# Altium PCB PCB1.PcbDoc
Units mil, origin at the board's own origin, x right, y up, seen from the top; angles counter-clockwise.
Board outline 5000 x 4000 mil, 2 copper layers (Top Layer, Bottom Layer); 17 components, 53 nets, 256 pads, 31 vias.
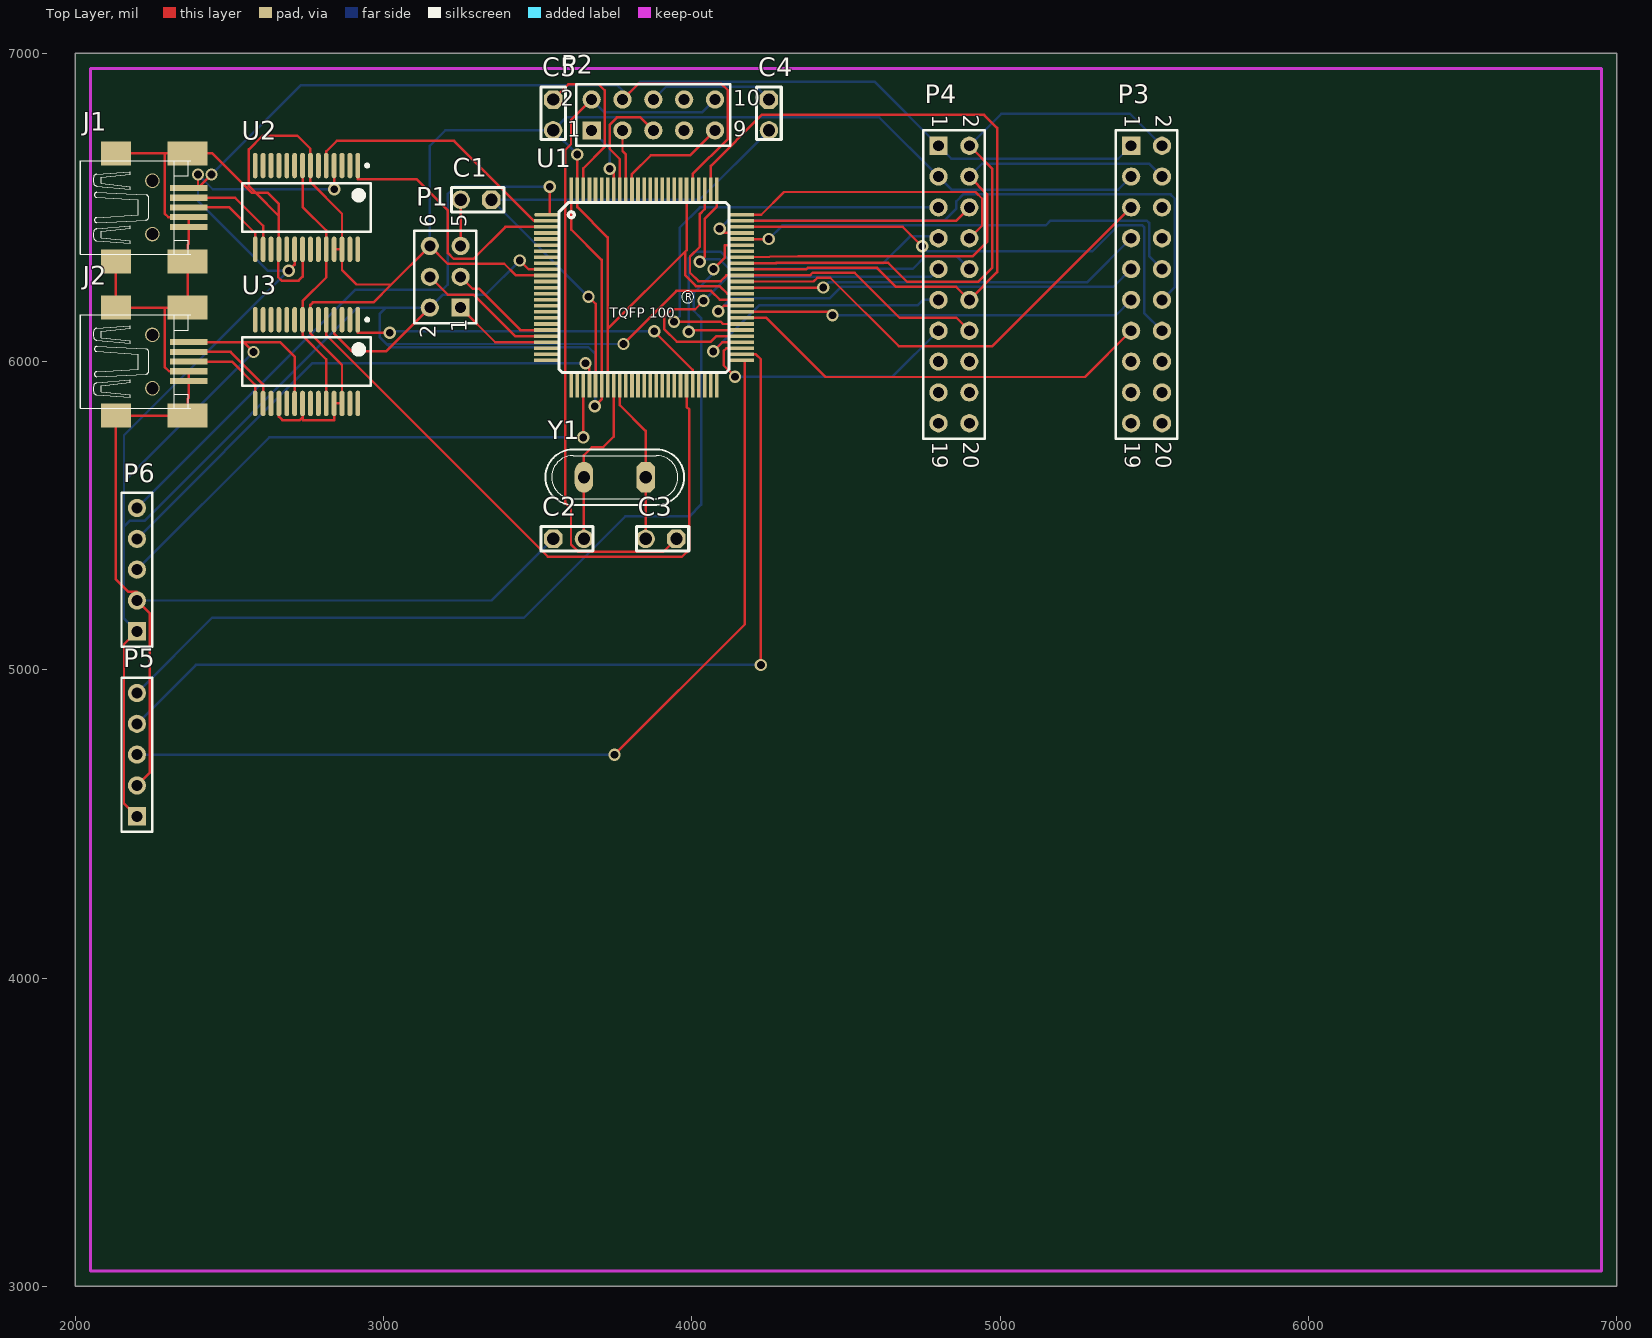
[diagram p0: Top Layer view]
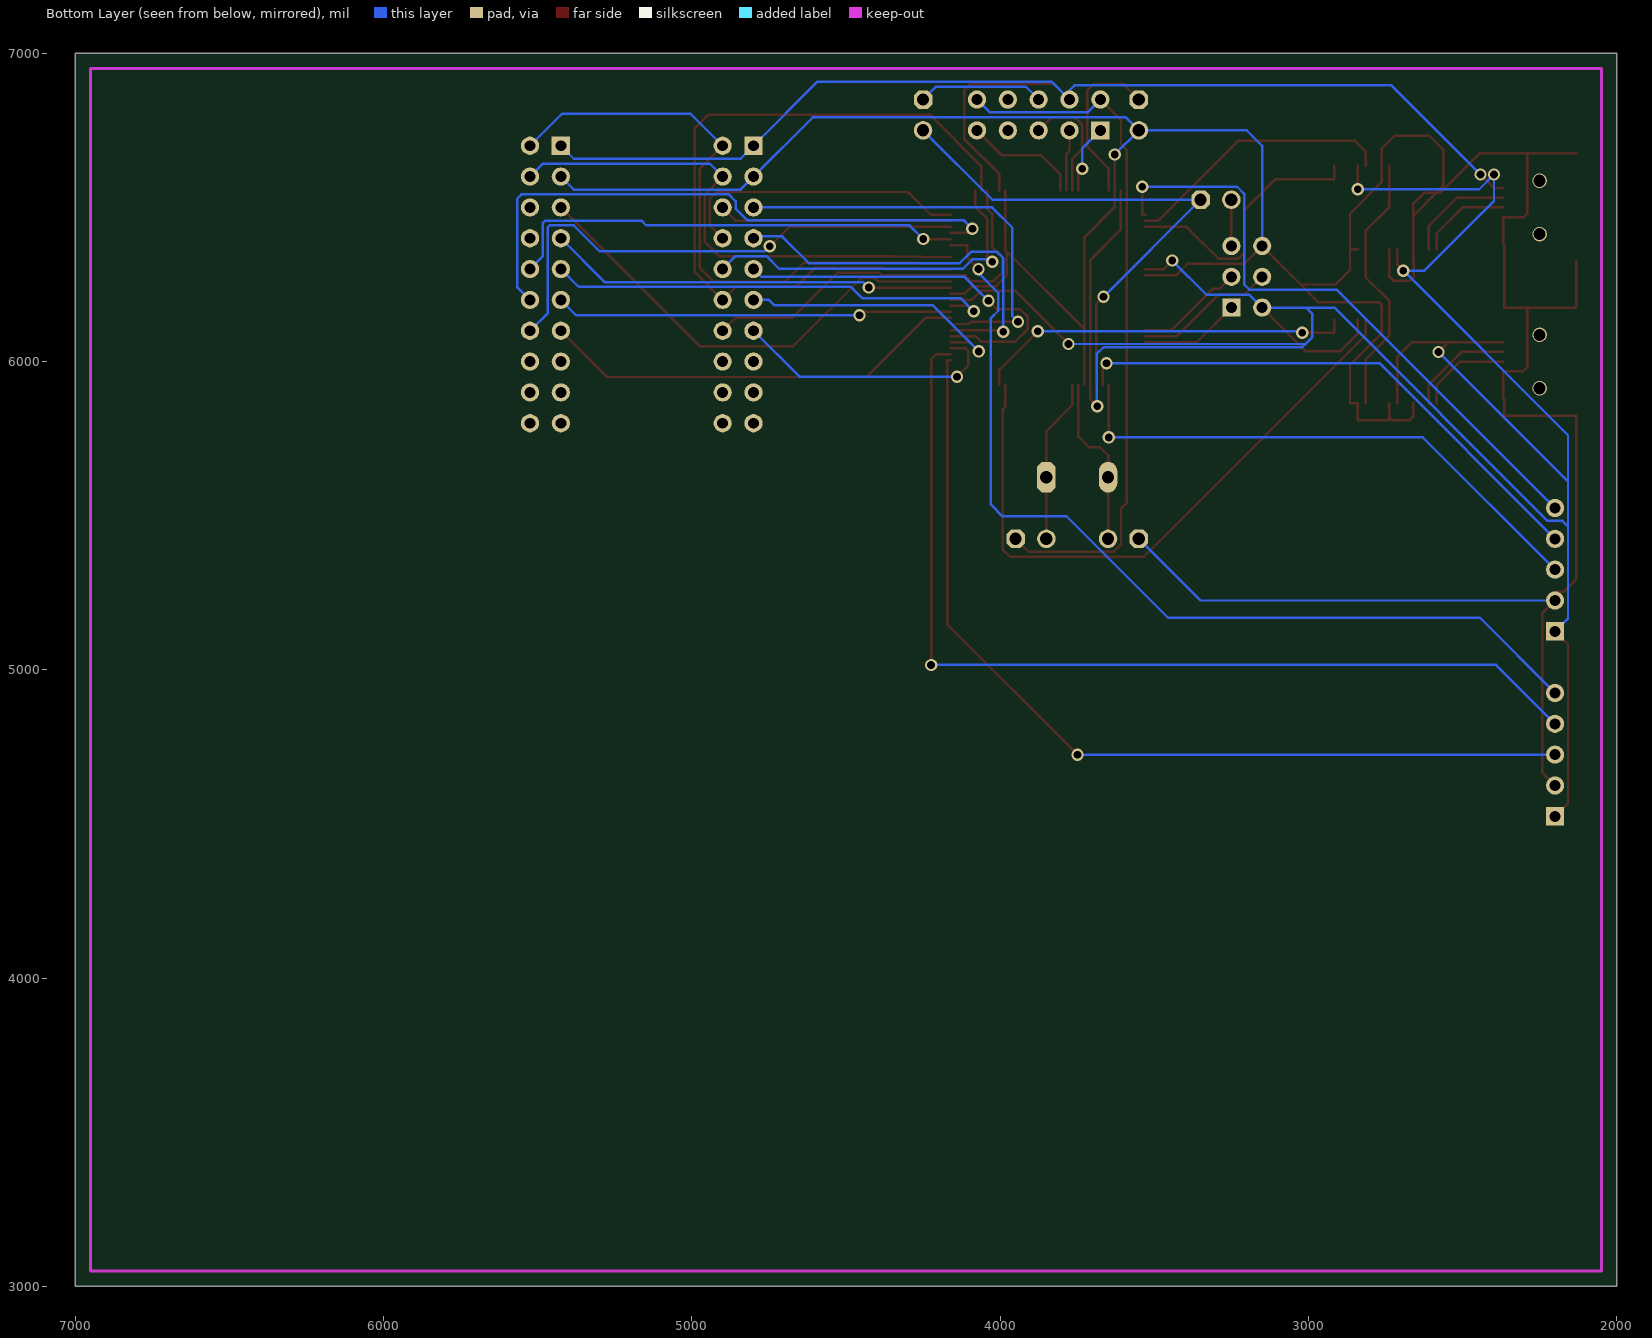
[diagram p1: Bottom Layer view, seen from below]

## Layer stack, top to bottom
Top Layer: signal copper 1.4
Dielectric: dielectric 12.6, FR-4, Dk 4.8
Bottom Layer: signal copper 1.4

## Board outline
2000,3000 7000,3000 7000,7000 2000,7000

## Design rules (kind name [scope] priority, off if disabled: settings)
Clearance [All] p1: gap=8
PolygonConnect [All] p1: connectstyle=Relief reliefconductorwidth=10 reliefentries=4 polygonreliefangle="90 Angle"
RoomDefinition Sheet1 [InComponentClass('Sheet1')] p1: confinementstyle=ConfineIn formatcopy=TRUE lockcomponents=FALSE outline 6855,3100 12145,3100 12145,4375 6855,4375
RoutingVias [All] p1: holewidth=25 width=40 viastyle="Through Hole" minholewidth=28 minwidth=50 maxholewidth=28 maxwidth=50
SilkscreenOverComponentPads [All] p1: minsilkscreentomaskgap=10
SolderMaskExpansion [All] p1: expansion=4
Width [All] p1: maxlimit=8 minlimit=8 preferedwidth=8
27 further rules are at their usual default settings.

## Classes and differential pairs
component class Sheet1: C2 C3 C4 C5 J1 J2 P1 P2 P3 P4 P5 U1 U2 U3 Y1

## Components (designator, comment, footprint, x,y, rotation, side; value= is the part's Value field where it differs from the comment)
C1 "Cap" My_cap100n 3300,6525 r180 top
C2 "Cap" My_cap100n 3600,5425 r0 top
C3 "Cap" My_cap100n 3900,5425 r180 top
C4 "Cap" My_cap100n 4250,6800 r270 top
C5 "Cap" My_cap100n 3550,6800 r270 top
J1 "Mini_USB" My_USB 2250,6500 r0 top
J2 "Mini_USB" My_USB 2250,6000 r0 top
P1 "Header 3X2" HDR2X3 3250,6175 r90 top
P2 "Header 5X2" HDR2X5 3675,6750 r0 top
P3 "Header 10X2" HDR2X10 5425,6700 r270 top
P4 "Header 10X2" HDR2X10 4800,6700 r270 top
P5 "Header 5" HDR1X5 2200,4525 r90 top
P6 "Header 5" HDR1X5 2200,5125 r90 top
U1 "ATMEGA2560" MY_ATMEGA2560 3750,6250 r0 top
U2 "IC_FT232RL" SSOP-28 2750,6500 r270 top
U3 "IC_FT232RL" SSOP-28 2750,6000 r270 top
Y1 "CRYSTAL" My_Crystal 3750,5625 r180 top

## Footprints (in the part's own frame and the unit in brackets; to place one, negate y for a bottom-side part, rotate by r counter-clockwise, add the part's x,y. Pads: shape width x height; smd on the part's side, far side on the other; paste and mask are expansions set on the pad)
HDR1X5 [mm] "Connector; Header; 5 Position"
  rect 1.5x1.5 hole 0.9: 1(0,0)
  round 1.5 hole 0.9: 2(2.54,0) 3(5.08,0) 4(7.62,0) 5(10.16,0)
  silkscreen extent -1.27,-1.27 11.43,1.27
HDR2X3 [mm] "Connector; Header; 3x2 Position"
  rect 1.5x1.5 hole 0.9: 1(0,0)
  round 1.5 hole 0.9: 2(0,2.54) 3(2.54,0) 4(2.54,2.54) 5(5.08,0) 6(5.08,2.54)
  silkscreen extent -1.27,-1.27 6.35,3.81
HDR2X5 [mm] "Connector; Header; 5x2 Position"
  rect 1.5x1.5 hole 0.9: 1(0,0)
  round 1.5 hole 0.9: 2(0,2.54) 3(2.54,0) 4(2.54,2.54) 5(5.08,0) 6(5.08,2.54) 7(7.62,0) 8(7.62,2.54) 9(10.16,0) 10(10.16,2.54)
  silkscreen extent -1.27,-1.27 11.43,3.81
HDR2X10 [mm] "Connector; Header; 10x2 Position"
  rect 1.5x1.5 hole 0.9: 1(0,0)
  round 1.5 hole 0.9: 2(0,2.54) 3(2.54,0) 4(2.54,2.54) 5(5.08,0) 6(5.08,2.54) 7(7.62,0) 8(7.62,2.54) 9(10.16,0) 10(10.16,2.54) 11(12.7,0) 12(12.7,2.54) 13(15.24,0) 14(15.24,2.54) 15(17.78,0) 16(17.78,2.54) 17(20.32,0) 18(20.32,2.54) 19(22.86,0) 20(22.86,2.54)
  silkscreen extent -1.27,-1.27 24.13,3.81
MY_ATMEGA2560 [mm]
  oval 2.1x0.3 smd: 1(-5.587,5.746)
  rect 2.1x0.3 smd: 2(-5.587,5.246) 3(-5.587,4.746) 4(-5.587,4.246) 5(-5.587,3.746) 6(-5.587,3.246) 7(-5.587,2.746) 8(-5.587,2.246) 9(-5.587,1.746) 10(-5.587,1.246) 11(-5.587,0.746) 12(-5.587,0.246) 13(-5.587,-0.254) 14(-5.587,-0.754) 15(-5.587,-1.254) 16(-5.587,-1.754) 17(-5.587,-2.254) 18(-5.587,-2.754) 19(-5.587,-3.254) 20(-5.587,-3.754) 21(-5.587,-4.254) 22(-5.587,-4.754) 23(-5.587,-5.254) 24(-5.587,-5.754) 25(-5.587,-6.254) 51(10.413,-6.254) 52(10.413,-5.754) 53(10.413,-5.254) 54(10.413,-4.754) 55(10.413,-4.254) 56(10.413,-3.754) 57(10.413,-3.254) 58(10.413,-2.754) 59(10.413,-2.254) 60(10.413,-1.754) 61(10.413,-1.254) 62(10.413,-0.754) 63(10.413,-0.254) 64(10.413,0.246) 65(10.413,0.746) 66(10.413,1.246) 67(10.413,1.746) 68(10.413,2.246) 69(10.413,2.746) 70(10.413,3.246) 71(10.413,3.746) 72(10.413,4.246) 73(10.413,4.746) 74(10.413,5.246) 75(10.413,5.746)
  rect 0.3x2.1 smd: 26(-3.587,-8.254) 27(-3.087,-8.254) 28(-2.587,-8.254) 29(-2.087,-8.254) 30(-1.587,-8.254) 31(-1.087,-8.254) 32(-0.587,-8.254) 33(-0.087,-8.254) 34(0.413,-8.254) 35(0.913,-8.254) 36(1.413,-8.254) 37(1.913,-8.254) 38(2.413,-8.254) 39(2.913,-8.254) 40(3.413,-8.254) 41(3.913,-8.254) 42(4.413,-8.254) 43(4.913,-8.254) 44(5.413,-8.254) 45(5.913,-8.254) 46(6.413,-8.254) 47(6.913,-8.254) 48(7.413,-8.254) 49(7.913,-8.254) 50(8.413,-8.254) 76(8.413,7.746) 77(7.913,7.746) 78(7.413,7.746) 79(6.913,7.746) 80(6.413,7.746) 81(5.913,7.746) 82(5.413,7.746) 83(4.913,7.746) 84(4.413,7.746) 85(3.913,7.746) 86(3.413,7.746) 87(2.913,7.746) 88(2.413,7.746) 89(1.913,7.746) 90(1.413,7.746) 91(0.913,7.746) 92(0.413,7.746) 93(-0.087,7.746) 94(-0.587,7.746) 95(-1.087,7.746) 96(-1.587,7.746) 97(-2.087,7.746) 98(-2.587,7.746) 99(-3.087,7.746) 100(-3.587,7.746)
  silkscreen extent -4.59,-7.25 9.41,6.75
My_cap100n [mil]
  oct 60x60 hole 40: 1(-50,0)
  round 60 hole 40: 2(50,0)
  silkscreen extent -90,-40 80,40
My_Crystal [mil]
  oct 60x100 hole 40: 1(-100,0)
  oval 60x100 hole 40: 2(100,0)
  silkscreen extent -225,-90 225,90
My_USB [mm]
  rect 3.1x0.5 smd: 1(3,1.6) 2(3,0.8) 3(3,0) 4(3,-0.8) 5(3,-1.6)
  rect 2.5x2 smd: 5(-3,-4.45) 5(-3,4.45)
  rect 3.3x2 smd: 5(2.9,-4.45) 5(2.9,4.45)
  round 1.2 hole 1 unplated: ""(0,-2.2) ""(0,2.2)
  silkscreen extent -5.92,-3.85 3.16,3.85
SSOP-28 [mm] "28-Pin SSOP 0.65 mm Pitch"
  oval 2.1x0.4 smd: 1(-3.45,4.225) 2(-3.45,3.575) 3(-3.45,2.925) 4(-3.45,2.275) 5(-3.45,1.625) 6(-3.45,0.975) 7(-3.45,0.325) 8(-3.45,-0.325) 9(-3.45,-0.975) 10(-3.45,-1.625) 11(-3.45,-2.275) 12(-3.45,-2.925) 13(-3.45,-3.575) 14(-3.45,-4.225) 15(3.45,-4.225) 16(3.45,-3.575) 17(3.45,-2.925) 18(3.45,-2.275) 19(3.45,-1.625) 20(3.45,-0.975) 21(3.45,-0.325) 22(3.45,0.325) 23(3.45,0.975) 24(3.45,1.625) 25(3.45,2.275) 26(3.45,2.925) 27(3.45,3.575) 28(3.45,4.225)
  silkscreen extent -3.57,-5.3 2,5.3, body extent -2.7,-5.3 2.7,5.3, height 2

## Part data
C1 C2 C3 C4 C5: library part "Cap ceramic", "CAP-100Nf"
J1 J2: "USB 2.0, Right Angle, SMT, B Type, Receptacle, 5 Position, Black"
P1: "Header, 3-Pin, Dual row"
P2: "Header, 5-Pin, Dual row"
P3 P4: "Header, 10-Pin, Dual row"
P5 P6: "Header, 5-Pin"
U1: "AVR 256K Bytes of In-System Programmable Flash Memory"
U2 U3: "FT232R USB UART"
Y1: "Crystal"

## Via types
v1: diameter 40, hole 25, Top Layer to Bottom Layer, 31 vias

## Nets (pads, with @x,y where several pads share a name; then routed paths per layer and width w, separated by ;. In a path a pad name is that pad's centre, name@x,y a point inside that pad or via, vN(x,y) a via of type N, cw(c..) or ccw(c..) an arc to the next point about the centre after c; other vN are vias at no path point)
GND: C2.1 C5.2 J1.4 J1.5 J2.4 J2.5 P1.6 P3.3 P4.3 P5.2 P6.2 U1.11 U1.32 U1.62 U1.81 U1.99 U2.7 U2.18 U2.21 U2.25 U2.26 U3.7 U3.18 U3.21 U3.25 U3.26 | length 12569.4
  Top Layer w8: J1.5@2131.89,6324.81 2131.89,6175.2 2290,6175.2 ; J1.5@2131.89,6675.2 2290,6675.2 ; P5.2 2242,4667 2242,5183 P6.2 2200,5253 2173,5253 2131,5295 2131,5824.81 2131.89,5824.81 2364.17,5824.81 2364.17,5878 2368.11,5881.94 2368.11,5937.01 J2.4 2304,5968.51 2290,5982.51 2290,6175.2 ; U3.18 2660.43,5821.57 2672,5810 2728,5810 2737.2,5819.2 ; U3.21 2737.2,5819.2 ; U2.21 2737.2,6275.6 2724.43,6262.83 2669.17,6262.83 2658.39,6273.61 2658.39,6324.79 2660.43,6326.83 U2.18 2660.43,6471.57 ; U2.25 U2.26 ; U1.11 3429.63,6279.37 3391.53,6317.47 3207.53,6317.47 P1.6 3025,6250 ; v1(3628.46,6671.54) U1.99 3628.46,6501 3726.89,6402.57 3726.89,6105.18 ; U1.32 3726.89,6105.18 ; U1.81 3982.79,6361.08 3978,6356.29 ; U1.62 4114.83,6220.31 4090.14,6245 4013.28,6245 3978,6280.28 3978,6356.29 ; 2290,6175.2 2364.17,6175.2 2364.17,6324.81 2364.17,6378 2368.11,6381.94 2368.11,6437.01 J1.4 2301.49,6468.51 2290,6480 2290,6675.2 ; 2290,6675.2 2364.17,6675.2 2445,6675.2 2572.2,6548 2584,6548 ; 2584,6548 2624,6548 2660.43,6511.57 2660.43,6471.57 ; 2584,6548 2563,6569 2563,6688 2608,6733 2720,6733 2762.8,6690.2 U2.7 2762.8,6582 2865.16,6479.64 U2.26 ; 2584,6548 2660.43,6471.57 ; 2737.2,5819.2 2737.2,5810 2839.57,5810 U3.25 U3.26 2865.16,5988.84 2762.8,6091.2 U3.7 2762.8,6184 2770.8,6192 2967,6192 3025,6250 ; U2.26 2865.16,6296.84 2912,6250 3025,6250 ; 3726.89,6105.18 3978,6356.29
  Bottom Layer w8: P6.2 3350,5225 C2.1 ; P1.6 3150,6700 3200,6750 C5.2 ; v1(3628.46,6671.54) C5.2 ; P3.3 5383,6558 4842,6558 P4.3 4608,6792 3592,6792 C5.2
NC: U2.8 U2.24 U3.8 U3.24 | length 867.1
  Top Layer w8: U2.8 2737.2,6502 2813.98,6425.23 U2.24 2813.98,6273 2737.2,6196.23 U3.8 2737.2,6084 2813.98,6007.23 U3.24
NetC1_2: C1.2 P1.5 | length 150
  Top Layer w8: P1.5 C1.2
NetC2_2: C2.2 U1.33 Y1.2 | length 561.1
  Top Layer w8: C2.2 Y1.2 3650,5696 3676,5722 3712,5722 3746.57,5756.57 U1.33
NetC3_1: C3.1 P2.2 P2.10 | length 2289.8
  Top Layer w8: P2.2 3608,6783 3608,6705 3590,6687 3590,5541 3608,5523 3608,5407 3632,5383 3908,5383 C3.1
  Bottom Layer w8: P2.2 3717,6808 4033,6808 P2.10
NetC3_2: C3.2 U1.34 Y1.1 | length 534.7
  Top Layer w8: U1.34 3766.26,5858.74 3850,5775 Y1.1 C3.2
NetC4_1: C4.1 P2.6 | length 409.8
  Bottom Layer w8: P2.6 3917,6892 4208,6892 C4.1
NetC5_1: C5.1 U1.98 | length 548.7
  Top Layer w8: C5.1 3599,6899 3698,6899 3717,6880 3717,6696 3648.15,6627.15 U1.98
NetJ1_2: J1.2 U2.16 | length 355.3
  Top Layer w8: J1.2 2518.5,6531.5 2609.25,6440.75 U2.16
NetJ1_3: J1.3 U2.15 | length 302.4
  Top Layer w8: J1.3 2500,6500 2583.66,6416.34 U2.15
NetJ2_2: J2.2 U3.16 | length 346.7
  Top Layer w8: J2.2 2503.75,6031.5 2609.25,5926 U3.16
NetJ2_3: J2.3 U3.15 | length 307.1
  Top Layer w8: J2.3 2508,6000 2583.66,5924.34 U3.15
NetP1_1: P1.1 U1.22 | length 326.5
  Top Layer w8: P1.1 3362.17,6062.83 U1.22
NetP1_3: P1.3 U1.20 | length 351.6
  Top Layer w8: P1.3 3289.39,6235.61 3310.61,6235.61 3444.01,6102.2 U1.20
NetP1_4: P1.4 U1.21 | length 459.8
  Top Layer w8: P1.4 3208,6217 3292,6217 3426.48,6082.52 U1.21
NetP2_1: P2.1 U1.93 | length 224.7
  Top Layer w8: v1(3734,6625) 3746.57,6612.43 U1.93
  Bottom Layer w8: P2.1 3734,6691 v1(3734,6625)
NetP2_3: P2.3 U1.91 | length 199.6
  Top Layer w8: P2.3 3775,6683.24 3785.94,6672.3 U1.91
NetP2_5: P2.5 U1.92 | length 396.2
  Top Layer w8: U1.92 3766.26,6657 3733,6690.26 3733,6768 3757,6792 3833,6792 P2.5
NetP2_9: P2.9 U1.90 | length 381.2
  Top Layer w8: U1.90 3805.63,6608 3866.63,6669 3994,6669 P2.9
NetP3_2: P3.2 P4.2 U1.67 | length 1996.7
  Top Layer w8: U1.67 4273,6318.74 4274.26,6320 4637,6320 4698.53,6258.47 4928.47,6258.47 4974,6304 4974,6626 P4.2
  Bottom Layer w8: P4.2 5004,6804 5421,6804 P3.2
NetP3_4: P3.4 P4.4 U1.68 | length 1712.9
  Top Layer w8: U1.68 4344.58,6342 4912,6342 4958,6388 4958,6542 P4.4
  Bottom Layer w8: P4.4 4942,6642 5483,6642 P3.4
NetP3_5: P3.5 U1.64 | length 1548.5
  Top Layer w8: U1.64 4394.68,6259.68 4407,6272 4449,6272 4671,6050 4975,6050 P3.5
NetP3_6: P3.6
NetP3_7: P3.7 U1.63 | length 1331.3
  Top Layer w8: U1.63 v1(4426.5,6240)
  Bottom Layer w8: v1(4426.5,6240) 4444.5,6258 5283,6258 P3.7
NetP3_8: P3.8
NetP3_9: P3.9 U1.60 | length 1477.1
  Top Layer w8: v1(4086,6163) 4103.94,6180.94 U1.60
  Bottom Layer w8: v1(4086,6163) 4129,6206 4448,6206 4484,6242 5367,6242 P3.9
NetP3_10: P3.10 U1.71 | length 1518.4
  Top Layer w8: U1.71 v1(4249.48,6397.48)
  Bottom Layer w8: v1(4249.48,6397.48) 4293.53,6441.53 5147.94,6441.53 5163.94,6457.53 5475.47,6457.53 5483,6450 5483,6342 P3.10
NetP3_11: P3.11 U1.59 | length 1290.4
  Top Layer w8: U1.59 4444.74,6161.26 v1(4456,6150)
  Bottom Layer w8: v1(4456,6150) 5375,6150 P3.11
NetP3_12: P3.12 U1.72 | length 1963.9
  Top Layer w8: v1(4090,6431) 4103.84,6417.16 U1.72
  Bottom Layer w8: v1(4090,6431) 4117,6458 4820,6458 4858,6496 4858,6520 4880,6542 5553,6542 5567,6528 5567,6242 P3.12
NetP3_13: P3.13 U1.58 | length 1406.5
  Top Layer w8: U1.58 4242,6141.57 4433.57,5950 5275,5950 P3.13
NetP3_14: P3.14 U1.73 | length 1736.6
  Top Layer w8: U1.73 4684.15,6436.85 v1(4747,6374)
  Bottom Layer w8: v1(4747,6374) 4763,6358 5299.47,6358 5383,6441.53 5461.47,6441.53 5467,6436 5467,6158 P3.14
NetP4_5: P4.5 U1.57 | length 1400.7
  Top Layer w8: v1(3942,6129) 4094.32,6129 4101.43,6121.89 U1.57
  Bottom Layer w8: v1(3942,6129) 3960.11,6147.11 3960.11,6434.11 4026,6500 P4.5
NetP4_6: P4.6 U1.74 | length 758
  Top Layer w8: U1.74 4856.54,6456.54 P4.6
NetP4_7: P4.7 U1.56 | length 1283.4
  Top Layer w8: v1(3990,6097) 3995.2,6102.2 U1.56
  Bottom Layer w8: v1(3990,6097) 3990,6336 4010,6356 4094.25,6356 4131.46,6318.79 4620.16,6318.79 4707.37,6406 4794,6406 P4.7
NetP4_8: P4.8 U1.75 | length 967.1
  Top Layer w8: U1.75 4225,6476.22 4298.78,6550 4920,6550 4942,6528 4942,6442 P4.8
NetP4_9: P4.9 U1.55 | length 1266.9
  Top Layer w8: v1(4038,6197) 4010.89,6169.89 3935.89,6169.89 3910,6144 3910,6105.89 3950.89,6065 4062,6065 4079.52,6082.52 U1.55
  Bottom Layer w8: v1(4038,6197) 4115.42,6274.42 4774.42,6274.42 P4.9
NetP4_10: P4.10 U1.76 | length 1178.4
  Top Layer w8: v1(4026,6324) 4042,6340 4042,6464 4081.22,6503.22 U1.76
  Bottom Layer w8: v1(4026,6324) 4034,6332 4090.04,6332 4121.04,6301 4717,6301 4758,6342 4858,6342 P4.10
NetP4_11: P4.11 U1.54 | length 903.5
  Top Layer w8: v1(4069,6033) 4098.83,6062.83 U1.54
  Bottom Layer w8: v1(4069,6033) 4218,6182 4732,6182 4750,6200 P4.11
NetP4_12: P4.12 U1.66 U1.77 | length 2474.7
  Top Layer w8: U1.77 4061.53,6635 4226.53,6800 4948,6800 4990,6758 4990,6290 P4.12 4857.53,6242.47 4662.53,6242.47 4601,6304 4375.91,6304 4370.96,6299.05 U1.66
NetP4_13: P4.13 U1.53 | length 880.9
  Top Layer w8: v1(4140,5951) 4103,5988 4103,6034.15 4112,6043.15 U1.53
  Bottom Layer w8: v1(4140,5951) 4651,5951 P4.13
NetP4_14: P4.14 U1.65 U1.78 | length 1293
  Top Layer w8: U1.78 4041.85,6494.85 4026,6479 4026,6372.29 3994,6340.29 3994,6288 4021,6261 4093.63,6261 4112,6279.37 U1.65 4383.28,6279.37 4391.91,6288 4528,6288 4674,6142 4858,6142 P4.14
NetP5_3: P5.3 U1.51 | length 3015
  Top Layer w8: v1(3749,4725) 4172,5148 4172,6003.78 U1.51
  Bottom Layer w8: P5.3 v1(3749,4725)
NetP5_4: P5.4 U1.52 | length 3165.2
  Top Layer w8: U1.52 4208,6023.46 4224,6007.46 v1(4224,5016)
  Bottom Layer w8: P5.4 2391,5016 v1(4224,5016)
NetP5_5: P5.5 U1.70 | length 3030.2
  Top Layer w8: v1(4070,6300) 4106,6336 4106,6377.79 U1.70
  Bottom Layer w8: P5.5 2444,5169 3455,5169 3784,5498 3992,5498 4030,5536 4030,6141 4006,6165 4006,6223 4070,6287 v1(4070,6300)
NetP6_3: P6.3 U1.28 | length 1796.9
  Top Layer w8: v1(3648.15,5754) U1.28
  Bottom Layer w8: P6.3 2629,5754 v1(3648.15,5754)
NetP6_4: P6.4 U1.29 | length 1766.4
  Top Layer w8: v1(3655,5995) 3667.83,5982.17 U1.29
  Bottom Layer w8: P6.4 2770,5995 v1(3655,5995)
NetP6_5: P6.5 U1.1 | length 2042.9
  Top Layer w8: U1.1 3539,6476.22 v1(3539,6567)
  Bottom Layer w8: P6.5 2908.47,6233.47 3192,6233.47 3208,6249.47 3208,6544 3231,6567 v1(3539,6567)
NetU1_2: U1.2 U2.5 | length 883.7
  Top Layer w8: U2.5 2813.98,6681.95 2848,6715.98 3228.56,6715.98 3488,6456.54 U1.2
NetU1_3: U1.3 U2.1 | length 888.6
  Top Layer w8: U2.1 2916.34,6592 3107,6592 3208.47,6490.53 3208.47,6352 3227,6333.47 3292,6333.47 3395.38,6436.85 U1.3
NetU1_45: U1.45 U3.5 | length 2073.5
  Top Layer w8: U3.5 2813.98,6086 3532.98,5367 3968,5367 3992,5391 3992,5844 3982.79,5853.21 U1.45
NetU1_46: U1.46 U3.1 | length 1230.1
  Top Layer w8: U3.1 2916.34,6093.66 v1(3020.16,6093.66) ; v1(3878,6098) 4002.48,5973.52 U1.46
  Bottom Layer w8: v1(3020.16,6093.66) 3024.5,6098 v1(3878,6098)
RESET: C1.1 C4.2 U1.30 | length 1733
  Top Layer w8: v1(3665,6210) 3687.52,6187.48 U1.30
  Bottom Layer w8: v1(3665,6210) C1.1 4025,6525 C4.2
VCC: J1.1 J2.1 P1.2 P2.4 P3.1 P4.1 P5.1 P6.1 U1.10 U1.31 U1.61 U1.80 U1.100 U2.4 U2.20 U3.4 U3.20 | length 13610
  Top Layer w8: P5.1 2158,4567 2158,5083 P6.1 ; J2.1 2546,6063 ; J1.1 J1.1@2398,6563 ; v1(2398,6607) J1.1@2398,6563 ; v1(2442,6607) J1.1@2398,6563 ; v1(2578,6031) 2546,6063 ; v1(2692,6295) 2711.61,6314.61 U2.20 ; U3.20 2711.61,6016 2664.61,6063 2546,6063 ; U3.4 2839.57,6090.43 2896,6034 3009,6034 P1.2 ; v1(2839.57,6559) U2.4 ; v1(3442,6328) 3470.95,6299.05 U1.10 ; U1.100 3608.78,6428.22 3707.2,6329.8 U1.31 3707.2,5877.2 v1(3685,5855) ; P2.4 3826,6901 4096,6901 4117,6880 4117,6722.52 4002.48,6608 U1.80 ; v1(3778,6057) 3950,6229 4062.63,6229 4091,6200.63 U1.61
  Bottom Layer w8: P6.1 2158,5167 2158,5465 ; v1(2442,6607) 2731,6896 3759,6896 3775,6880 P2.4 3833,6908 4592,6908 P4.1 4842,6658 5383,6658 P3.1 ; v1(2578,6031) 2158,5611 ; v1(2839.57,6559) 2446,6559 v1(2398,6607) 2398,6521 2624,6295 v1(2692,6295) 2158,5761 2158,5611 ; v1(3442,6328) 3331.47,6217.47 3192.47,6217.47 P1.2 3008,6175 ; v1(3685,5855) 3687,5857 3687,6024 3664,6047 3020,6047 3010,6057 ; v1(3778,6057) 3010,6057 ; 2158,5465 2176,5483 2224,5483 2916,6175 3008,6175 ; 2158,5465 2158,5611 ; 3008,6175 2987,6154 2987,6080 3010,6057
pads on no net: J1. J2. P2.7 P2.8 P3.15 P3.16 P3.17 P3.18 P3.19 P3.20 P4.15 P4.16 P4.17 P4.18 P4.19 P4.20 U1.4 U1.5 U1.6 U1.7 U1.8 U1.9 U1.12 U1.13 U1.14 U1.15 U1.16 U1.17 U1.18 U1.19 U1.23 U1.24 U1.25 U1.26 U1.27 U1.35 U1.36 U1.37 U1.38 U1.39 U1.40 U1.41 U1.42 U1.43 U1.44 U1.47 U1.48 U1.49 U1.50 U1.69 U1.79 U1.82 U1.83 U1.84 U1.85 U1.86 U1.87 U1.88 U1.89 U1.94 U1.95 U1.96 U1.97 U2.2 U2.3 U2.6 U2.9 U2.10 U2.11 U2.12 U2.13 U2.14 U2.17 U2.19 U2.22 U2.23 U2.27 U2.28 U3.2 U3.3 U3.6 U3.9 U3.10 U3.11 U3.12 U3.13 U3.14 U3.17 U3.19 U3.22 U3.23 U3.27 U3.28

## Keep-outs
Keep-Out Layer:
  lines w10: 2050,3050 2050,6950 6950,6950 6950,3050 2050,3050

## Silkscreen, mask and mechanical layers (free items; w line width, h text height)
Drill Drawing:
  text ".LEGEND" at 7010,3240 h60
  text "Drill Drawing." at 7010,3140 h60

## Dimensions
2050,3050 to 2050,6950 on Mechanical 1
2050,3050 to 6950,3050 on Mechanical 1

## Text inside footprints (layer, text, board x,y; h text height)
P1: Top Overlay "6" at 3170,6435 h50 r90; Top Overlay "5" at 3270,6435 h50 r90; Top Overlay "2" at 3170,6075 h50 r90; Top Overlay "1" at 3270,6095 h50 r90
P2: Top Overlay "10" at 4135,6830 h50; Top Overlay "9" at 4135,6730 h50; Top Overlay "1" at 3595,6730 h50; Top Overlay "2" at 3575,6830 h50
P3: Top Overlay "20" at 5505,5740 h50 r270; Top Overlay "19" at 5405,5740 h50 r270; Top Overlay "1" at 5405,6800 h50 r270; Top Overlay "2" at 5505,6800 h50 r270
P4: Top Overlay "20" at 4880,5740 h50 r270; Top Overlay "19" at 4780,5740 h50 r270; Top Overlay "1" at 4780,6800 h50 r270; Top Overlay "2" at 4880,6800 h50 r270
U1: Top Overlay "TQFP 100" at 3734.37,6142.36 h32; Top Overlay "R" at 3978.46,6197.87 h24